# EAGLE board uFTDI4x4r1 (EAGLE 6.2)

Size 40.64 x 40.64 mm. Coordinates in mm from the lower left corner, seen from the top.
Outline: 40.64,40.64 40.64,0 0,0 0,40.64 40.64,40.64
Copper layers (1*16): Top 0.035mm / dielectric 1.5mm / Bottom 0.035mm
Design rules: minimum track width 8mil, minimum drill 20mil, track to track 8mil, track to pad 8mil, pad to pad 8mil, via to via 8mil, smd to smd 8mil, copper to edge 10mil, drill to drill 8mil, minimum pad ring 12mil, minimum via ring 10mil, stop-mask expansion 4mil, vias tented up to drill 25mil, thermal gap 10mil
Net classes: 0 default: width 0.254 mm, drill 0.406 mm, clearance 0.203 mm; 1 power: width 0.305 mm, clearance 0.203 mm
Holes 2 mm at 3.81,39.37 36.83,1.27 36.83,39.37 3.81,1.27
tRestrict: area -0.3,-1.9 to 42.9,0.6; area -0.3,41.9 to 42.9,44.5; area -1.9,0 to 0.6,43.2; area 41.6,0 to 44.1,43.2
bRestrict: area -1.9,0 to 0.6,43.2; area 41.6,0 to 44.1,43.2; area -0.3,-1.9 to 42.9,0.6; area -0.3,41.9 to 42.9,44.5

## Footprints (pad centres in the part's own frame; a part is rotated, then mirrored left to right if it is on the bottom)
C0805 = smd 1.3 x 1.5: 1 -0.85,0; 2 0.85,0
32005-301 = smd 3.1 x 0.5: 1 3,1.6; 2 3,0.8; 3 3,0; 4 3,-0.8; 5 3,-1.6 | smd 2.5 x 2: M1 -3,-4.45; M2 -3,4.45 | smd 3.3 x 2: M3 2.9,4.45; M4 2.9,-4.45 | hole 0.9: 0,2.2; 0,-2.2
SSOP-16 = smd 0.35 x 1.4: 1 -2.223,-2.775; 2 -1.587,-2.775; 3 -0.953,-2.775; 4 -0.318,-2.775; 5 0.318,-2.775; 6 0.953,-2.775; 7 1.587,-2.775; 8 2.223,-2.775; 9 2.223,2.775; 10 1.587,2.775; 11 0.953,2.775; 12 0.318,2.775; 13 -0.318,2.775; 14 -0.953,2.775; 15 -1.587,2.775; 16 -2.223,2.775
JP2 = drill 0.914 long: 1 -2.54,0; 2 0,0; 3 2.54,0
JP1 = drill 0.914 long: 1 0,-1.27; 2 0,1.27
612X2020621 = smd 0.9 x 4: 1 0,-3; 2 0,3; 3 2.54,-3; 4 2.54,3; 5 5.08,-3; 6 5.08,3; 7 7.62,-3; 8 7.62,3; 9 10.16,-3; 10 10.16,3; 11 12.7,-3; 12 12.7,3; 13 15.24,-3; 14 15.24,3; 15 17.78,-3; 16 17.78,3; 17 20.32,-3; 18 20.32,3; 19 22.86,-3; 20 22.86,3
61002021821 = smd 1 x 1.8: 1 -11.43,2.6; 2 -8.89,2.6; 3 -6.35,2.6; 4 -3.81,2.6; 5 -1.27,2.6; 6 1.27,2.6; 7 3.81,2.6; 8 6.35,2.6; 9 8.89,2.6; 10 11.43,2.6; 11 11.43,-2.6; 12 8.89,-2.6; 13 6.35,-2.6; 14 3.81,-2.6; 15 1.27,-2.6; 16 -1.27,-2.6; 17 -3.81,-2.6; 18 -6.35,-2.6; 19 -8.89,-2.6; 20 -11.43,-2.6
0805 = smd 1.2 x 1: 1 -1.2,0; 2 1.2,0
CHIPLED_0805 = smd 1.2 x 1.2: A 0,-1.05; C 0,1.05
R0805 = smd 1.3 x 1.5: 1 -0.85,0; 2 0.85,0

## Placement (x,y rotation side)
C16  47pF/S  [C0805]  12.06,-43.81 0 top  (outside the outline)
C17  47pF/S  [C0805]  -17.14,-49.53 0 top  (outside the outline)
C18  10nF/S  [C0805]  -9.53,-49.53 0 top  (outside the outline)
C20  10nF/S  [C0805]  -1.91,-49.53 0 top  (outside the outline)
C21  100nF/S  [C0805]  3.17,-43.81 0 top  (outside the outline)
CN4  MINI-USB  [32005-301]  -0.64,-9.53 0 top  (outside the outline)
IC1  FT230XS  [SSOP-16]  8.89,-6.99 0 top  (outside the outline)
JP2  [JP2]  -15.24,-26.04 0 top  (outside the outline)
JP3  [JP2]  -6.99,-26.04 0 top  (outside the outline)
JP5  [JP1]  13.97,-24.77 0 top  (outside the outline)
K1  1175-1623-ND  [612X2020621]  6.35,31.75 270 bottom
K2  1175-1623-ND  [612X2020621]  34.29,31.75 270 bottom
K3  S5680-ND  [61002021821]  6.35,20.32 90 top
K4  S5680-ND  [61002021821]  34.29,20.32 90 top
L2  WE-CBF_0805  [0805]  -0.64,-24.77 0 top  (outside the outline)
LED1  CHIPLED0805-YEL/S  [CHIPLED_0805]  -10.16,-19.68 0 top  (outside the outline)
LED2  CHIPLED0805-GRN/S  [CHIPLED_0805]  -16.51,-20.32 0 top  (outside the outline)
R23  4K7/S 1%  [R0805]  -6.99,-38.1 0 top  (outside the outline)
R24  10K/S 1%  [R0805]  3.17,-38.1 0 top  (outside the outline)
R25  4K7/S 1%  [R0805]  -17.14,-43.81 0 top  (outside the outline)
R26  10K/S 1%  [R0805]  -6.99,-43.81 0 top  (outside the outline)
R27  22R/S 1%  [R0805]  5.71,-32.38 0 top  (outside the outline)
R28  22R/S 1%  [R0805]  -17.14,-38.1 0 top  (outside the outline)
R32  10K0/S 1%  [R0805]  -17.14,-32.38 0 top  (outside the outline)
R33  10K0/S 1%  [R0805]  -5.71,-32.38 0 top  (outside the outline)

## Library data of the parts
C16 C17 = rcl; KATODO: 10.1050.00xx
C18 C20 = rcl; KATODO: 10.1050.0005
C21 = rcl; KATODO: 10.1050.0004
CN4 = pixsys
IC1 = ftdichip
JP2 JP3 JP5 = jumper
K1 K2 = Wuerth_Elektronik_eiCan_Wire_to_Board_Connectors
K3 K4 = Wuerth_Elektronik_eiCan_Board_to_Board_Connectors
L2 = Wuerth_Elektronik_eiSos_V6; DIGIKEY: 732-1610-1-ND; WURTH: http://katalog.we-online.de/pbs/datasheet/742792095.pdf
LED1 LED2 = led
R23 R25 = rcl; KATODO: 10.2040.0014
R24 R26 R32 R33 = rcl; KATODO: 10.2040.0001
R27 R28 = rcl; KATODO: 10.2040.0019

## Nets
+3V3: C21.2 IC1.3 IC1.10 K2.3 K4.12 LED1.A LED2.A
+5V: JP5.2 K2.2 K4.10
+12V: K2.1 K4.11
_RESET: C20.2 IC1.11 R25.1 R26.2
_VCC: IC1.12 JP5.1 L2.2 R25.2
ANA1: K1.17 K3.19
ANA2: K1.18 K3.2
ANB1: K1.19 K3.20
ANB2: K1.20 K3.1
CHA1: K1.5 K3.13
CHA2: K1.6 K3.8
CHB1: K1.7 K3.14
CHB2: K1.8 K3.7
DATA+: C17.2 CN4.3 R28.1
DATA-: C16.2 CN4.2 R27.1
EN1: K1.13 K3.17
EN2: K1.14 K3.4
GND: C16.1 C17.1 C18.1 C20.1 C21.1 CN4.5 CN4.M1 CN4.M2 CN4.M3 CN4.M4 IC1.5 IC1.13 K1.15 K1.16 K2.4 K2.9 K2.10 K2.19 K3.3 K3.18 K4.6 K4.9 K4.15 K4.20 R24.1 R26.1
IO0: K2.12 K4.5
IO1: K2.14 K4.4
IO2: K2.16 K4.3
IO3: K2.18 K4.2
IO4: K2.20 K4.1
IO5: K2.17 K4.19
IO6: K2.15 K4.18
IO7: K1.2 K3.10
IO8: K1.1 K3.11
N$4: IC1.7 R33.2
N$6: IC1.14 R32.2
N$13: C18.2 CN4.1 L2.1 R23.2
N$18: LED1.C R32.1
N$20: LED2.C R33.1
PWMA1: K1.9 K3.15
PWMA2: K1.10 K3.6
PWMB1: K1.11 K3.16
PWMB2: K1.12 K3.5
RX: IC1.4 JP3.2
RX1: JP3.1 K2.7 K4.14
RX2: JP3.3 K2.11 K4.16
SCL: K2.8 K4.7
SDA: K2.6 K4.8
TX: IC1.1 JP2.2
TX1: JP2.3 K2.5 K4.13
TX2: JP2.1 K2.13 K4.17
USBDM: IC1.9 R27.2
USBDP: IC1.8 R28.2
VBUS_SENSE: IC1.15 R23.1 R24.2
VENC: K1.3 K1.4 K3.9 K3.12

## Tracks (layer width: path | path; a pad name or v marks a point on that pad's centre or on a via)
+3V3  (6 unrouted)
+5V  (2 unrouted)
+12V  (1 unrouted)
_RESET  (3 unrouted)
_VCC  (3 unrouted)
ANA1  (1 unrouted)
ANA2  (1 unrouted)
ANB1  (1 unrouted)
ANB2  (1 unrouted)
CHA1  (1 unrouted)
CHA2  (1 unrouted)
CHB1  (1 unrouted)
CHB2  (1 unrouted)
DATA+  (2 unrouted)
DATA-  (2 unrouted)
EN1  (1 unrouted)
EN2  (1 unrouted)
GND  (25 unrouted)
IO0  (1 unrouted)
IO1  (1 unrouted)
IO2  (1 unrouted)
IO3  (1 unrouted)
IO4  (1 unrouted)
IO5  (1 unrouted)
IO6  (1 unrouted)
IO7  (1 unrouted)
IO8  (1 unrouted)
N$4  (1 unrouted)
N$6  (1 unrouted)
N$13  (3 unrouted)
N$18  (1 unrouted)
N$20  (1 unrouted)
PWMA1  (1 unrouted)
PWMA2  (1 unrouted)
PWMB1  (1 unrouted)
PWMB2  (1 unrouted)
RX  (1 unrouted)
RX1  (2 unrouted)
RX2  (2 unrouted)
SCL  (1 unrouted)
SDA  (1 unrouted)
TX  (1 unrouted)
TX1  (2 unrouted)
TX2  (2 unrouted)
USBDM  (1 unrouted)
USBDP  (1 unrouted)
VBUS_SENSE  (2 unrouted)
VENC  (3 unrouted)

## Text on the board
tPlace: M2 | M1 | BUS | IO7 | IO8 | 5V | 12V | VENC | GND | 3v | CHA | SDA | TX1 | CHB | SCL | RX1 | PWMA | GND | GND | PWMB | IO0 | RX2 | EN | IO1 | TX2 | GND | IO2 | IO6 | AN A | IO3 | IO5 | AN B | IO4 | GND | GPIO